# Altium PCB MCU.PcbDoc
Units mil, origin at the board's own origin, x right, y up, seen from the top; angles counter-clockwise.
Board outline 3805.33 x 3910.33 mil, 2 copper layers (Top Layer, Bottom Layer); 103 components, 97 nets, 426 pads, 104 vias.
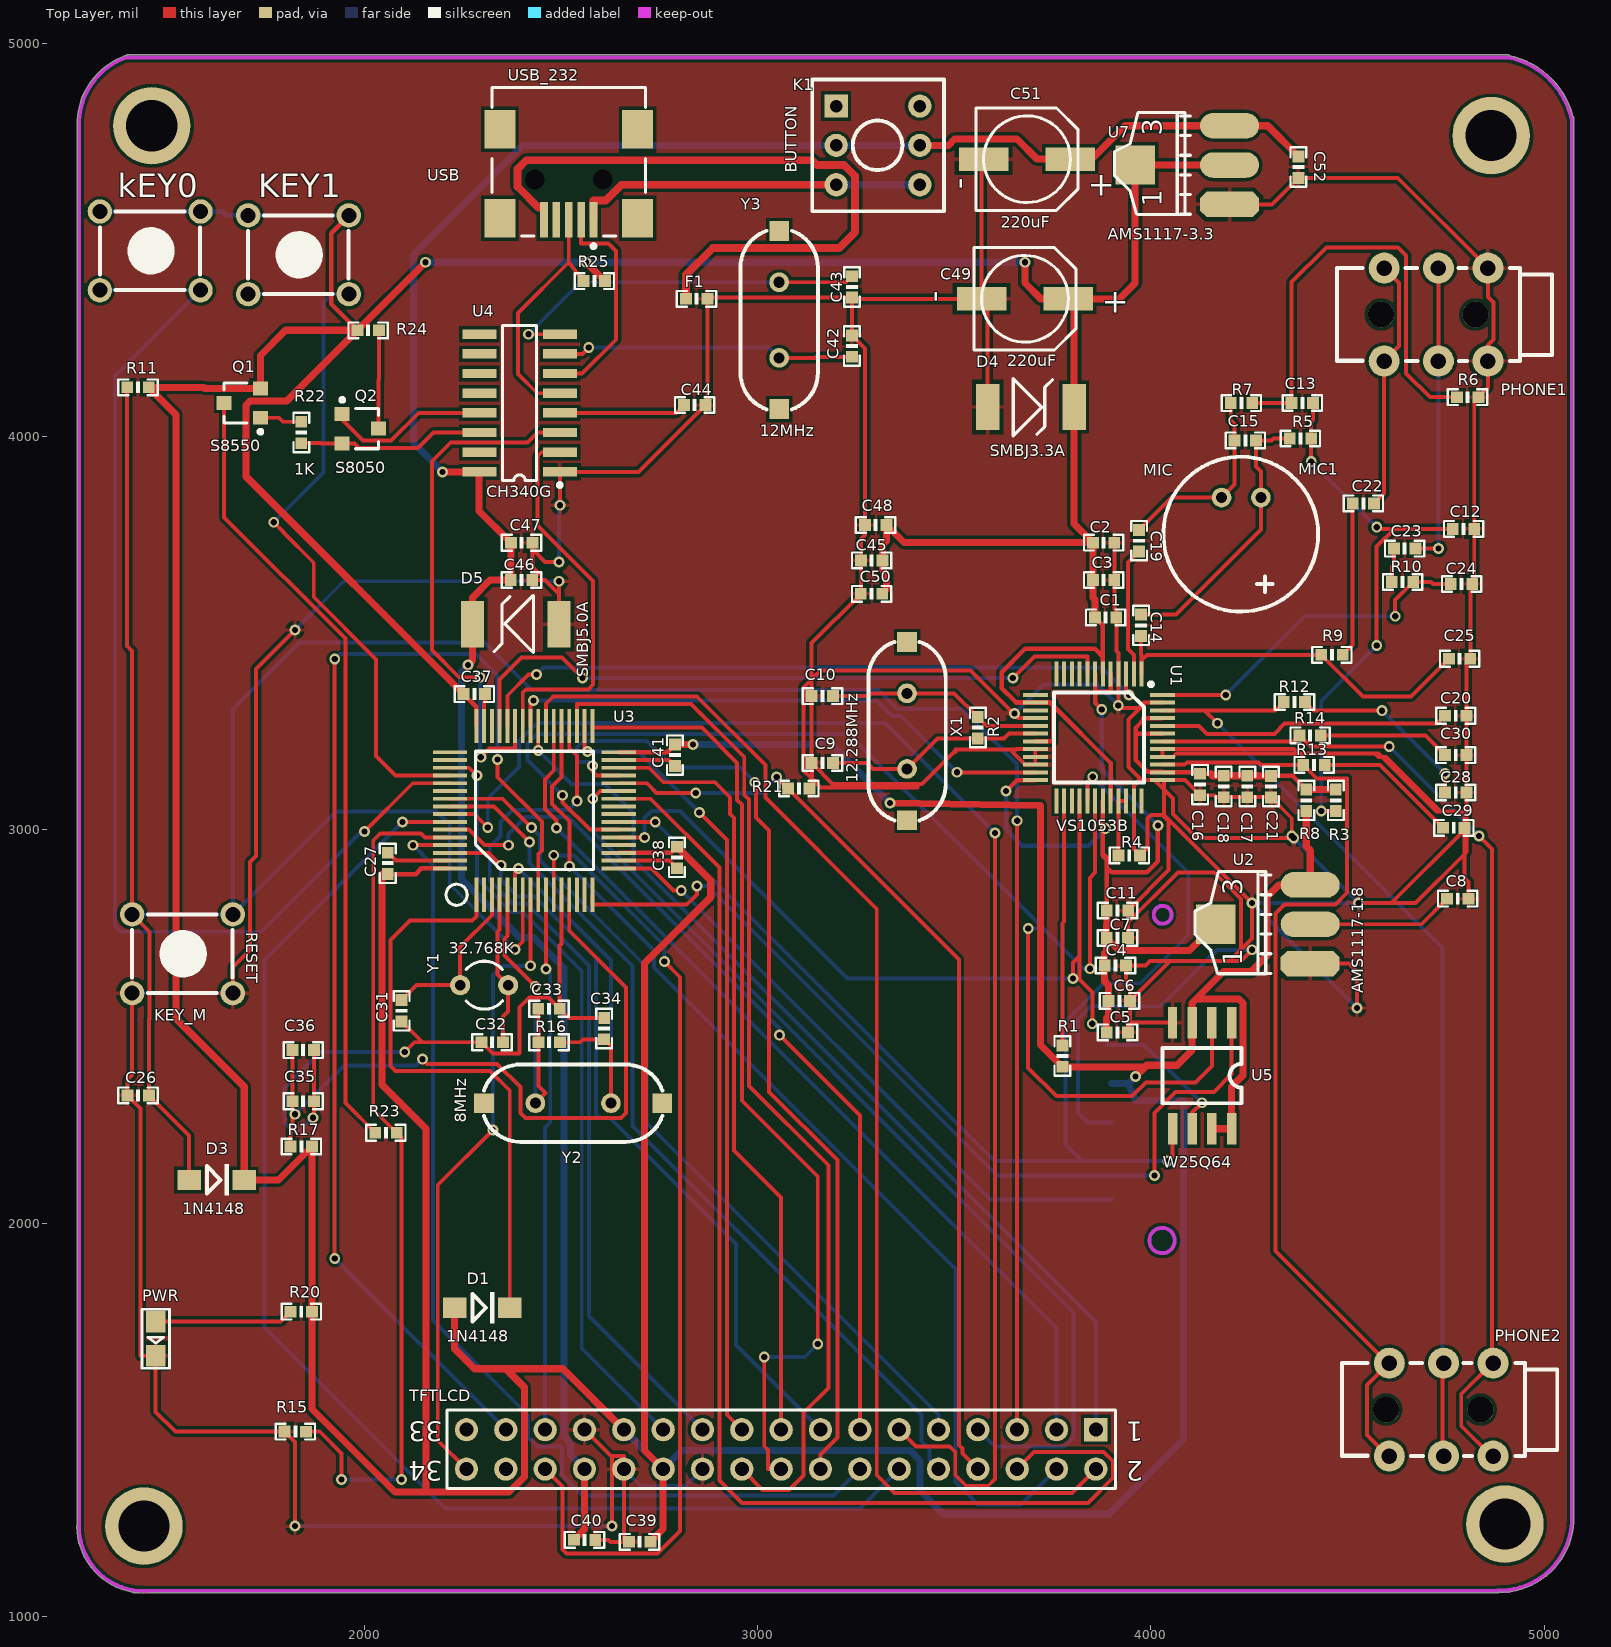
[diagram p0: Top Layer view]
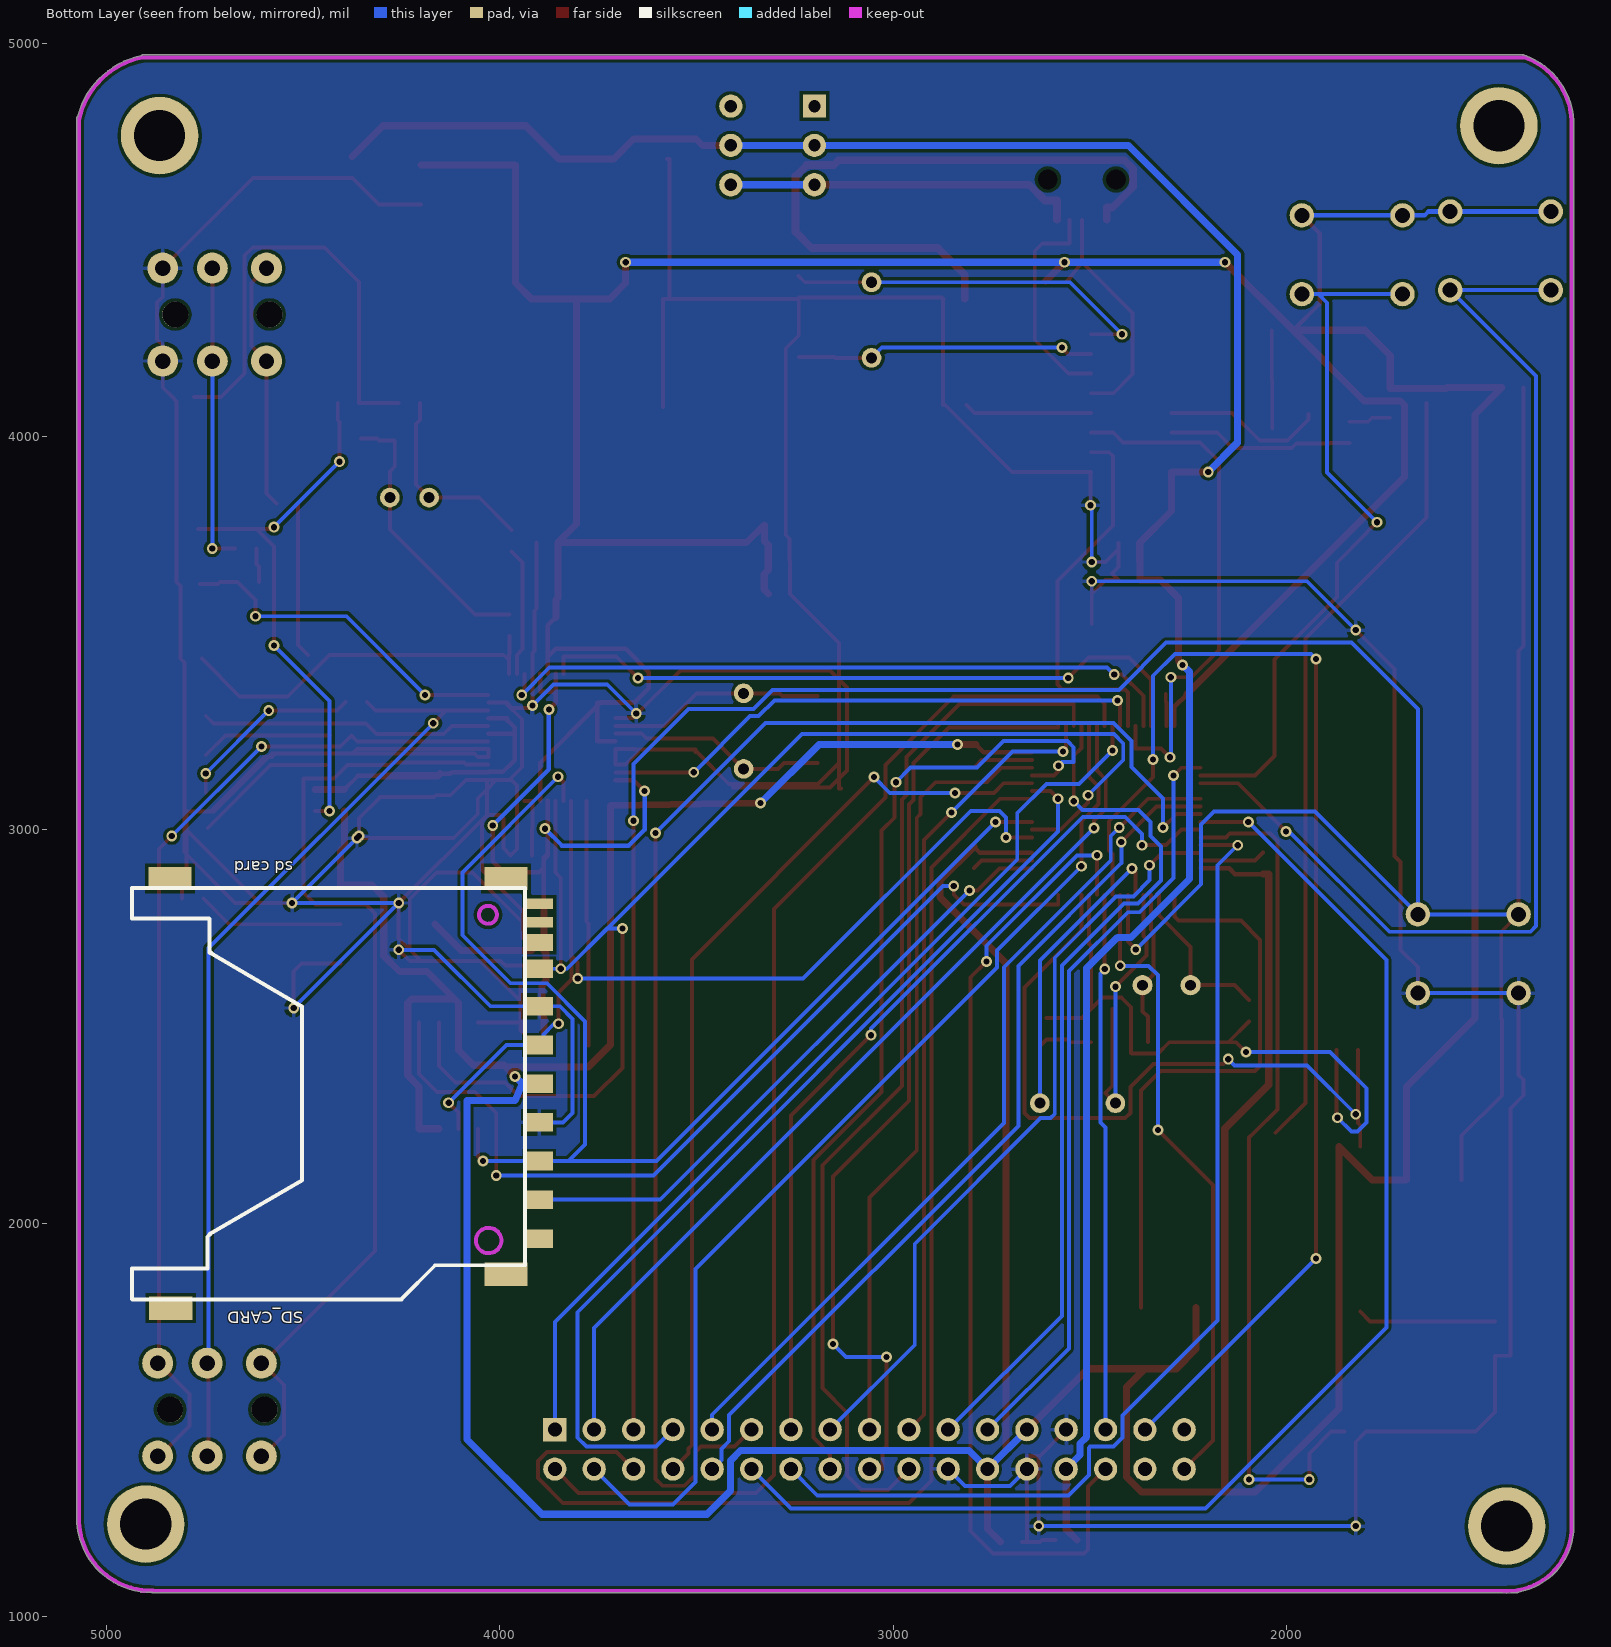
[diagram p1: Bottom Layer view, seen from below]

## Layer stack, top to bottom
Top Layer: signal copper 1.4
Dielectric: dielectric 12.6, FR-4, Dk 4.8
Bottom Layer: signal copper 1.4

## Board outline
1269.68,1230 cw(c1274.7,1230) 1269.98,1231.72 1269.98,4799.82 cw(c1275,4799.82) 1270.19,4801.24 cw(c1275,4802.66) 1269.99,4802.93 cw(c1456.74,4792.84) 1396.08,4969.74 cw(c1397.71,4965) 1397.71,4970.02 cw(c1397.71,4965) 1397.71,4970.02 4908.08,4970.02 cw(c4908.08,4965) 4911.89,4968.25 cw(c4867.4,4760.53) 5072.99,4814.02 cw(c5070,4810) 5075.02,4810 5075.02,1240.34 ccw(c5070,1240.34) 5075.02,1240.34 cw(c5070,1240.34) 5075.01,1240.07 cw(c4886.41,1250) 4884.37,1061.15 cw(c4881.16,1065) 4881.16,1059.98 1450.15,1059.98 cw(c1440,1230) 1429.85,1059.98 1415,1059.98 cw(c1415,1065) 1410.84,1062.2 cw(c1440,1230)

## Design rules (kind name [scope] priority, off if disabled: settings)
Clearance [All] p1: gap=8
PolygonConnect [All] p1: connectstyle=Relief reliefconductorwidth=10 reliefentries=4 polygonreliefangle="90 Angle" airgapwidth=10
RoutingVias [All] p1: holewidth=15.75 width=27.56 viastyle="Through Hole" minholewidth=15.75 minwidth=27.56 maxholewidth=15.75 maxwidth=27.56
SolderMaskExpansion [All] p1: expansion=4
Width Width_7 [InNet('NetK1_3')] p1: maxlimit=20 minlimit=20 preferedwidth=20
Width Width_6 [InNet('GND')] p2: maxlimit=10 minlimit=10 preferedwidth=10
Width Width_5 [InNet('CVDD')] p3: maxlimit=18 minlimit=11.5 preferedwidth=11.5
Width Width_4 [InNet('VCC')] p4: maxlimit=18 minlimit=11.5 preferedwidth=11.5
Width Width_3 [InNet('VCC5')] p5: maxlimit=18 minlimit=18 preferedwidth=18
Width Width_2 [InNet('AVDD')] p6: maxlimit=18 minlimit=11.5 preferedwidth=11.5
Width Width_1 [InNet('NetF1_1')] p7: maxlimit=19.68 minlimit=19.68 preferedwidth=19.68
Width [All] p8: maxlimit=10 minlimit=10 preferedwidth=10
28 further rules are at their usual default settings.

## Components (designator, comment, footprint, x,y, rotation, side; value= is the part's Value field where it differs from the comment)
C1 "104" 0603P 3885,3540 r180 top
C2 "104" 0603P 3880,3730 r180 top
C3 "104" 0603P 3880,3635 r180 top
C4 "104" 0603P 3910,2655 r180 top
C5 "104" 0603P 3915,2485 r180 top
C6 "104" 0603P 3920,2565 r180 top
C7 "104" 0603P 3915,2725 r180 top
C8 "10uF" 0603P 4780,2825 r0 top
C9 "22" 0603P 3165,3170 r180 top
C10 "22" 0603P 3165,3340 r180 top
C11 "104" 0603P 3915,2795 r0 top
C12 "10uf" 0603P 4795,3765 r180 top
C13 "10uf" 0603P 4385,4085 r180 top
C14 "1uf" 0603P 3975,3520 r90 top
C15 "1uf" 0603P 4240,3990 r180 top
C16 "104" 0603P 4125,3115 r90 top
C17 "104" 0603P 4245,3110 r90 top
C18 "104" 0603P 4185,3110 r90 top
C19 "1uf" 0603P 3970,3735 r90 top
C20 "1uf" 0603P 4775,3290 r180 top
C21 "10uF" 0603P 4305,3110 r270 top
C22 "1uf" 0603P 4540,3830 r0 top
C23 "1uf" 0603P 4645,3715 r0 top
C24 "104" 0603P 4790,3625 r180 top
C25 "104" 0603P 4785,3435 r180 top
C26 "10uF" 0603P 1425,2325 r0 top
C27 "104" 0603P 2060,2915 r270 top
C28 "103" 0603P 4775,3095 r180 top
C29 "103" 0603P 4770,3005 r180 top
C30 "473" 0603P 4775,3190 r180 top
C31 "22PF" 0603P 2095,2540 r90 top
C32 "22PF" 0603P 2325,2460 r0 top
C33 "22PF" 0603P 2470,2545 r180 top
C34 "22PF" 0603P 2610,2495 r270 top
C35 "10uF" 0603P 1845,2310 r0 top
C36 "104" 0603P 1845,2440 r0 top
C37 "104" 0603P 2280,3345 r180 top
C38 "104" 0603P 2795,2930 r270 top
C39 "104" 0603P 2700,1190 r0 top
C40 "104" 0603P 2560,1195 r0 top
C41 "104" 0603P 2790,3190 r270 top
C42 "22PF" 0603P 3240,4230 r270 top
C43 "22PF" 0603P 3240,4380 r90 top
C44 "104" 0603P 2840,4080 r0 top
C45 "104" 0603P 3290,3685 r0 top
C46 "10uF" 0603P 2400,3635 r180 top
C47 "104" 0603P 2400,3730 r0 top
C48 "104" 0603P 3300,3775 r0 top
C49 "220uF" CC6.56.5 3680,4350 r180 top
C50 "104" 0603P 3290,3600 r180 top
C51 "220uF" CC6.56.5 3685,4705 r180 top
C52 "104" 0603P 4375,4685 r270 top
D1 "1N4148" DIODE_SOP 2230,1785 r0 top
D3 "1N4148" DIODE_SOP 1555,2110 r0 top
D4 "SMBJ3.3A" SMBJ 3690,4075 r0 top
D5 "SMBJ5.0A" SMBJ 2390,3523 r180 top
F1 "104" 0603P 2845,4350 r0 top
K1 "BUTTON" BTN8.5*8.5 3200,4840 r0 top
kEY0 "KEY_M" KEY_M 1328,4572 r0 top
KEY1 "KEY_M" KEY_M 1705,4562 r0 top
MIC1 "MIC" MIC 4280,3845 r180 top
PHONE1 "PHONE_M" PHONE_ST 4725,4310 r0 top
PHONE2 "PHONE_M" PHONE_ST 4738,1526 r0 top
PWR "LED1" SMDLED 1470,1750 r270 top
Q1 "S8550" SOT-23R 1695,4085 r90 top
Q2 "S8050" SOT-23R 1985,4020 r270 top
R1 "100K" 0603P 3775,2425 r270 top
R2 "1M" 0603P 3560,3260 r270 top
R3 "1k" 0603P 4470,3075 r90 top
R4 "100K" 0603P 3945,2935 r0 top
R5 "1k" 0603P 4380,3995 r0 top
R6 "1k" 0603P 4805,4100 r0 top
R7 "1k" 0603P 4230,4085 r0 top
R8 "10R" 0603P 4395,3075 r90 top
R9 "510" 0603P 4460,3445 r0 top
R10 "510" 0603P 4640,3630 r180 top
R11 "10K" 0603P 1425,4125 r180 top
R12 "10R" 0603P 4365,3325 r180 top
R13 "10R" 0603P 4415,3165 r180 top
R14 "10R" 0603P 4405,3240 r180 top
R15 "10K" 0603P 1825,1470 r180 top
R16 "1M" 0603P 2470,2460 r0 top
R17 "10K" 0603P 1840,2195 r180 top
R20 "510" 0603P 1840,1775 r180 top
R21 "10K" 0603P 3105,3105 r180 top
R22 "1K" 0603P 1840,4010 r90 top
R23 "1K" 0603P 2055,2230 r0 top
R24 "10K" 0603P 2010,4270 r0 top
R25 "1.5K" 0603P 2585,4395 r180 top
RESET "KEY_M" KEY_M 1410,2785 r0 top
SD_CARD "sd card" SDCARD_L 3900,2060 r270 bottom locked
TFTLCD "TFT_LCD" HDR2X17 3860,1475 r180 top
U1 "VS1053B" mTQFP48 3925,3230 r270 top
U2 "AMS1117-1.8" AMS1117 4405,2660 r90 top
U3 "STM32F103RDT6" LQFP64 2285,2835 r90 top
U4 "CH340G" SOP16M 2395,4085 r90 top
U5 "W25Q64" SOIC-8 4205,2510 r270 top
U7 "AMS1117-3.3" AMS1117 4200,4590 r90 top
USB_232 "USB" USB/SM0.8-6H5 2520,4860 r90 top
X1 "12.288MHz" XTAL_US 3380,3155 r90 top
Y1 "32.768K" R38 2305,2605 r90 top
Y2 "8MHz" XTAL_US 2435,2305 r0 top
Y3 "12MHz" XTAL_US 3055,4200 r90 top

## Footprints (in the part's own frame and the unit in brackets; to place one, negate y for a bottom-side part, rotate by r counter-clockwise, add the part's x,y. Pads: shape width x height; smd on the part's side, far side on the other; paste and mask are expansions set on the pad)
0603P [mil]
  rect 30x30 smd: 1(-27,0) 2(27.5,-0.06)
  silkscreen extent -50,-20 50,20
AMS1117 [mil]
  oct 65x150 smd: 1(0.03,-0.06)
  oval 65x150 smd: 2(100.03,-0.06) 3(200.03,-0.06)
  rect 100x100 smd: 4(100.03,239.94)
  silkscreen extent -26,100 234,293
BTN8.5*8.5 [mm]
  rect 1.5x1.5 hole 0.8: 1(0,0)
  round 1.5 hole 0.8: 2(0,-2.54) 3(0,-5.08) 4(5.4,-5.08) 5(5.4,-2.54) 6(5.4,0)
  silkscreen extent -1.55,-6.79 6.95,1.71
CC6.56.5 [mm]
  rect 3.2x1.5 smd: 1(-2.794,0) 2(2.8,0)
  silkscreen extent -3.3,-3.3 3.3,3.3
DIODE_SOP [mm]
  rect 1.5x1.3 smd: 1(0,0) 2(3.556,0)
  silkscreen extent 1.14,-1.02 2.56,1.02
HDR2X17 [mm] "Connector; Header; 17x2 Position"
  rect 1.5x1.5 hole 0.9: 1(0,0)
  round 1.5 hole 0.9: 2(0,2.54) 3(2.54,0) 4(2.54,2.54) 5(5.08,0) 6(5.08,2.54) 7(7.62,0) 8(7.62,2.54) 9(10.16,0) 10(10.16,2.54) 11(12.7,0) 12(12.7,2.54) 13(15.24,0) 14(15.24,2.54) 15(17.78,0) 16(17.78,2.54) 17(20.32,0) 18(20.32,2.54) 19(22.86,0) 20(22.86,2.54) 21(25.4,0) 22(25.4,2.54) 23(27.94,0) 24(27.94,2.54) 25(30.48,0) 26(30.48,2.54) 27(33.02,0) 28(33.02,2.54) 29(35.56,0) 30(35.56,2.54) 31(38.1,0) 32(38.1,2.54) 33(40.64,0) 34(40.64,2.54)
  silkscreen extent -1.27,-1.27 41.91,3.81
KEY_M [mil]
  round 62 hole 38: 1(0,0) 1(255.91,0) 2(0,-200) 2(255.91,-200)
  silkscreen extent 0,-200 255,0
LQFP64 [mm] "LQFP64"
  rect 2.2x0.254 smd: 1(0,0) 2(0,-0.5) 3(0,-1) 4(0,-1.5) 5(0,-2) 6(0,-2.5) 7(0,-3) 8(0,-3.5) 9(0,-4) 10(0,-4.5) 11(0,-5) 12(0,-5.5) 13(0,-6) 14(0,-6.5) 15(0,-7) 16(0,-7.5) 33(10.9,-7.5) 34(10.9,-7) 35(10.9,-6.5) 36(10.9,-6) 37(10.9,-5.5) 38(10.9,-5) 39(10.9,-4.5) 40(10.9,-4) 41(10.9,-3.5) 42(10.9,-3) 43(10.9,-2.5) 44(10.9,-2) 45(10.9,-1.5) 46(10.9,-1) 47(10.9,-0.5) 48(10.9,0)
  rect 0.254x2.2 smd: 17(1.7,-9.2) 18(2.2,-9.2) 19(2.7,-9.2) 20(3.2,-9.2) 21(3.7,-9.2) 22(4.2,-9.2) 23(4.7,-9.2) 24(5.2,-9.2) 25(5.7,-9.2) 26(6.2,-9.2) 27(6.7,-9.2) 28(7.2,-9.2) 29(7.7,-9.2) 30(8.2,-9.2) 31(8.7,-9.2) 32(9.2,-9.2) 49(9.2,1.7) 50(8.7,1.7) 51(8.2,1.7) 52(7.7,1.7) 53(7.2,1.7) 54(6.7,1.7) 55(6.2,1.7) 56(5.7,1.7) 57(5.2,1.7) 58(4.7,1.7) 59(4.2,1.7) 60(3.7,1.7) 61(3.2,1.7) 62(2.7,1.7) 63(2.2,1.7) 64(1.7,1.7)
  silkscreen extent -0.68,-7.56 9.26,1.95
MIC [mil]
  round 50 hole 28: 1(0.42,0.29) 2(100.42,0.29)
  silkscreen extent -145,-104 248,290
mTQFP48 [mm]
  rect 1.6x0.254 smd: 1(-4.223,1.3) 2(-4.223,0.8) 3(-4.223,0.3) 4(-4.223,-0.2) 5(-4.223,-0.7) 6(-4.223,-1.2) 7(-4.223,-1.7) 8(-4.223,-2.2) 9(-4.223,-2.7) 10(-4.223,-3.2) 11(-4.223,-3.7) 12(-4.223,-4.2) 25(3.977,-4.2) 26(3.977,-3.7) 27(3.977,-3.2) 28(3.977,-2.7) 29(3.977,-2.2) 30(3.977,-1.7) 31(3.977,-1.2) 32(3.977,-0.7) 33(3.977,-0.2) 34(3.977,0.3) 35(3.977,0.8) 36(3.977,1.3)
  rect 0.254x1.6 smd: 13(-2.873,-5.55) 14(-2.373,-5.55) 15(-1.873,-5.55) 16(-1.373,-5.55) 17(-0.873,-5.55) 18(-0.373,-5.55) 19(0.127,-5.55) 20(0.627,-5.55) 21(1.127,-5.55) 22(1.627,-5.55) 23(2.127,-5.55) 24(2.627,-5.55) 37(2.627,2.65) 38(2.127,2.65) 39(1.627,2.65) 40(1.127,2.65) 41(0.627,2.65) 42(0.127,2.65) 43(-0.373,2.65) 44(-0.873,2.65) 45(-1.373,2.65) 46(-1.873,2.65) 47(-2.373,2.65) 48(-2.873,2.65)
  silkscreen extent -3.68,-4.35 2.78,2.03
PHONE_ST [mm]
  round 1.676 hole 1.676: 0(-3.556,0) 0(2.54,0)
  round 2 hole 1: 1(-3.35,-3) 1(-3.35,3) 2(0.15,-3) 2(0.15,3) 3(3.35,-3) 3(3.35,3)
  silkscreen extent -6.39,-3.01 7.49,3
R38 [mm] "Crystal, Thru-Hole; 2 Leads; Body 3.1 x 8.2 mm (Dia.xH)"
  round 1.3 hole 0.7: 1(0,1.55) 2(0,-1.55)
  silkscreen extent -1.55,-1.19 1.55,1.17
SDCARD_L [mm]
  rect 1.2x1.8 smd: 1(0,0) 2(-2.489,0) 3(-4.983,-0.009) 4(-7.483,-0.009) 5(-9.983,-0.009) 6(-12.483,-0.009) 7(-14.908,-0.009) 9(2.517,-0.009)
  rect 1.1x1.8 smd: 8(-16.612,0)
  rect 0.7x1.8 smd: 10(-17.908,-0.009) 12(-19.101,0)
  rect 1.5x2.8 smd: 11(-20.726,-23.834) 11(-20.726,-2.143) 11(4.826,-2.143) 11(7.01,-23.784)
  Keep-Out Layer circle w0.254: c2.642,-3.26 r0.82
  Keep-Out Layer circle w0.254: c-18.39,-3.3 r0.58
  silkscreen extent -20.13,-26.3 6.44,-0.9
SMBJ [mm]
  rect 1.5x3 smd: 1(-2.667,0) 2(2.921,0)
  silkscreen extent -1.02,-1.85 1.52,1.83
SMDLED [mm]
  rect 1.4x1.27 smd: 1(0.001,-0.002) 2(2.211,-0.002)
  silkscreen extent -0.8,-0.89 3.01,0.89
SOIC-8 [mil]
  rect 80x24 smd: 1(0,0) 2(0,-50.06) 3(0,-100.06) 4(0,-150.06) 5(270,-150) 6(270,-100) 7(270,-50) 8(270,0)
  silkscreen extent 65,-175 205,25
SOP16M [mm]
  rect 0.6x2.2 smd: 1(-4.445,-2.6) 2(-3.175,-2.6) 3(-1.905,-2.6) 4(-0.635,-2.6) 5(0.635,-2.6) 6(1.905,-2.6) 7(3.175,-2.6) 8(4.445,-2.6) 9(4.445,2.6) 10(3.175,2.6) 11(1.905,2.6) 12(0.635,2.6) 13(-0.635,2.6) 14(-1.905,2.6) 15(-3.175,2.6) 16(-4.445,2.6)
  silkscreen extent -5.42,-2.72 5,1.1
SOT-23R [mm]
  rect 0.9x0.95 smd: 1(0.95,-1.048) 2(-0.95,-1.048) 3(0,1.302)
  silkscreen extent -1.98,-1.17 1.3,1.3
USB/SM0.8-6H5 [mm]
  rect 2.3x0.5 smd: 1(-7.85,-1.6) 2(-7.85,-0.8) 3(-7.85,0) 4(-7.85,0.8) 5(-7.85,1.6)
  rect 2.5x2 smd: 6(-7.75,4.45) 7(-1.996,4.45) 8(-7.75,-4.45) 9(-1.996,-4.45)
  round 0.6 hole 1.27 unplated: MH1(-5.25,2.2) MH2(-5.25,-2.2)
  silkscreen extent -9.67,-4.95 0.7,4.95
XTAL_US [mil]
  round 50 hole 28: 1(0,0) 2(192.13,0)
  rect 50x50 smd: ""(-130.32,0) ""(322.44,0)
  silkscreen extent -131,-98 323,98

## Part data
C1 C2 C3 C4 C5 C6 C7 C8 C9 C10 C11 C12 C13 C14 C15 C16 C17 C18 C19 C20 C21 C22 C23 C24 C25 C26 C27 C28 C29 C30 C31 C32 C33 C34 C35 C36 C37 C38 C39 C40 C41 C42 C43 C44 C45 C46 C47 C48 C50 C52 F1: library part C
C49 C51: library part CAP
D1 D3: library part D
D4 D5: library part SMBJ, "TVS"
PWR: library part LED2, "Typical RED, GREEN, YELLOW, AMBER GaAs LED"
Q1: library part PNP, "8550/BCW68"
Q2: library part NPN, "8050/BCW846/BCW847"
R1 R2 R3 R4 R5 R6 R7 R8 R9 R10 R11 R12 R13 R14 R15 R16 R17 R20 R21 R22 R23 R24 R25: library part R
U1: library part VS1053
U2 U7: library part AMS1117
U4: "USB2UART"
U5: library part W25X16, "W25X16;SST25VF016;MX25L1605"
USB_232: library part USB5
X1 Y1 Y2 Y3: library part XTAL, "Crystal Oscillator"

## Free pads (board coordinates)
  round 196.85 hole 129.92: 1(1440,1230) 2(1460,4790) 3(4865,4765) 4(4900,1235)

## Via types
v1: diameter 27.56, hole 15.75, Top Layer to Bottom Layer, 104 vias

## Nets (pads, with @x,y where several pads share a name; then routed paths per layer and width w, separated by ;. In a path a pad name is that pad's centre, name@x,y a point inside that pad or via, vN(x,y) a via of type N, cw(c..) or ccw(c..) an arc to the next point about the centre after c; other vN are vias at no path point)
AVDD: C16.2 C17.2 C18.2 C21.1 R3.2 R8.2 U1.38 U1.43 U1.45 | length 772.6
  Top Layer w11.5: 3981,3284 3981.05,3284.05 3986.05,3284.05 ; U1.43 3962,3244.68 ; U1.45 3986.05,3284.05 ; 4152,3142.5 C16.2 4125.06,3144.56 4123,3144.56 4121.3,3146.26 U1.38 4028.4,3147.19 3992.14,3147.19 3962,3177.33 3962,3244.68 ; C21.1 4360.56,3137 R8.2 ; 3962,3244.68 3962,3260 3986.05,3284.05
  Top Layer w18: 4152,3142.5 4157,3137.5 C18.2 C17.2 4274,3137.5 4274.5,3137 C21.1 ; R8.2 R3.2
BOOT0: R15.1 R23.2 U3.60 | length 2193.8
  Top Layer w10: R15.1 1887,1470 1942,1415 v1(1942,1348) ; v1(2095,1348) 2095,2217.43 R23.2 2023,2289.43 2023,2972.67 2040.85,2990.52 2144.27,2990.52 2154.12,2980.67 U3.60
  Bottom Layer w10: v1(1942,1348) v1(2095,1348)
"CH340 +": R25.2 U4.5 USB_232.3 | length 632.9
  Top Layer w10: U4.5 2440,4110 2391,4159 2391,4314 2520,4443 ; USB_232.3 2520,4443 ; R25.2 2520,4443
"CH340 -": U4.6 USB_232.2 | length 560.6
  Top Layer w10: U4.6 2554,4160 2640,4246 2640,4472 2621,4491 2551.5,4491 USB_232.2
CVDD: C4.2 C5.2 C6.2 C7.2 C11.1 U1.5 U1.7 U1.24 U1.31 U2.4 | length 2195.4
  Top Layer w11.5: v1(3632,3098.57) 3660,3126.57 U1.24 ; U1.7 3858.07,3351 ; v1(3875,3306) 3858.07,3322.93 3858.07,3351 ; U1.31 v1@3877.76,3010.24 ; v1(3885,3003) v1@3877.76,3010.24 ; C11.1 3888,2904 ; U1.5 3897.44,3351 3858.07,3351 ; v1(4018,3011) 4018,2920 3990,2892 3900,2892 3888,2904 ; 3877.76,2939.24 v1@3877.76,3010.24 ; 3877.76,2939.24 3888,2929 3888,2923.76 ; 3877.76,2939.24 3877.76,2934 3888,2923.76 ; 3888,2904 3888,2923.76
  Top Layer w18: C5.2 3887.5,2522 3892.5,2527 C6.2 3892.5,2605 3882.5,2615 C4.2 3882.5,2687 3887.5,2692 C7.2 ; C11.1 3888,2759.5 3887.5,2759 C7.2 ; U2.4 4098.03,2693 3919.56,2693 C7.2
  Bottom Layer w11.5: v1(3632,3098.57) 3632,3000 3672,2960 3842,2960 v1(3885,3003) ; v1(3875,3306) 3875,3154 v1(4018,3011)
"F CS": U3.16 U5.1 | length 2317.4
  Top Layer w10: U3.16 2580.27,2810 2820,2810 2846,2836 v1(2846,2857) ; v1(4009,2121) 4009,2280 4063,2334 4160,2334 4205,2379 U5.1
  Bottom Layer w10: v1(2846,2857) 2873.46,2857 3609.46,2121 v1(4009,2121)
GND: C1.1 C2.1 C3.1 C4.1 C5.1 C6.1 C7.1 C8.2 C9.2 C10.2 C11.2 C12.1 C16.1 C17.1 C18.1 C20.1 C21.2 C24.1 C25.1 C26.1 C28.1 C29.1 C30.1 C39.1 C40.2 C42.1 C43.1 C44.2 C45.1 C46.1 C47.2 C48.1 C49.2 C50.2 C51.2 C52.2 D4.1 D5.1 F1.2 PHONE1.3 PWR.2 R4.2 R6.2 R15.2 R21.1 RESET.2 SD_CARD.3 SD_CARD.6 TFTLCD.22 TFTLCD.26 TFTLCD.27 U1.4 U1.16 U1.20 U1.21 U1.22 U1.35 U1.37 U1.40 U1.41 U1.47 U2.1 U4.1 U5.4 U7.1 | length 22462.3
  Top Layer w10: RESET.2@1410,2585 1410,2377 1398,2365 C26.1 1431,2292 1431,1662.96 PWR.2 1469.94,1520 1519.87,1470.06 R15.2 1824,1443.56 v1(1824,1230) ; RESET.2@1665.91,2585 1665.91,2650.91 1710,2695 1710,2918 1725,2933 1725,3409 v1(1824,3508) ; C47.2 2427.5,3713.5 ; D5.1 2495,3600 ; v1(2495,3632) 2495,3600 ; v1(2495,3681) 2460,3681 2427.5,3713.5 ; U4.1 U4.1@2498,3910 ; v1(2498,3825) U4.1@2498,3910 ; TFTLCD.27 2627,1408 ; C40.2 2621.06,1194.94 2626,1190 C39.1@2660,1190 ; v1(2630,1230) 2630,1405 2627,1408 ; C39.1 C39.1@2660,1190 ; R21.1 3138,3105 3138,3130 ; C51.2 3569,4705 C49.2@3569,4350 ; D4.1 3585,4350 C49.2 C49.2@3569,4350 ; v1(3653,3296) v1@3662,3287 ; U1.22 U1.22@3706,3165.94 ; U1.21 U1.21@3706,3185.63 ; U1.20 U1.20@3706,3205.31 ; U1.16 3664.95,3284.05 v1@3662,3287 ; C2.1 C3.1 3907,3562 3912,3557 C1.1 3912,3455.13 3917.13,3450 U1.4 v1(3917.13,3316) 3923.13,3310 3968.58,3310 3982,3323.42 3986.42,3323.42 ; C7.1 3942,2765 ; U1.47 3986.42,3323.42 ; U5.4 3947,2510 ; U7.1 4307.47,4590.03 C52.2 4627.5,4657.5 4856.89,4428.11 4856.89,4355.11 4871,4341 4871,4247.11 4856.89,4233 4856.89,4191.89 4856.89,4124.33 R6.2 4822,4089.44 C12.1 4822,3630 C24.1 4812,3620 C25.1 4802,3425 C20.1 C30.1 C28.1 4802,3052 ; v1(4257,2695) 4229,2667 4200,2667 ; v1(4358,2984) 4358,3029.44 C21.2 4304.44,3083 C17.1 C18.1 4167,3083 4162,3088 C16.1 4086.43,3126.57 U1.37@4033,3126.57 ; v1(4363,2979) 4117,2979 4056,3040 4056,3080 4033,3103 ; U2.1 4503.97,2660.03 4524,2640 v1(4524,2547) ; v1(4528,2814) 4611,2814 ; C8.2 4807.5,2867.5 4797,2878 4797,2938 ; 2427.5,3713.5 2427.5,3668.5 2444,3652 C46.1 2460,3635 2495,3600 ; U4.1@2498,3910 2697.56,3910 C44.2 2873,4079.94 2873,4349.44 F1.2 2875.56,4353 C43.1 ; 2627,1408 2660,1408 TFTLCD.26 C39.1@2660,1190 ; 3137.5,3382.5 3137.5,3475.06 C50.2 3262.5,3684.5 C45.1 3263,3740 3273,3750 C48.1 3273,4224 C42.1 C43.1 ; 3137.5,3382.5 C10.2 C9.2 C9.2@3138,3169.56 ; 3137.5,3382.5 3160,3405 3541.05,3405 3662,3284.05 v1@3662,3287 ; 3137.5,3382.5 3117,3362 3117,3151 3138,3130 ; 3138,3130 3160,3108 3407,3108 3407,3117 ; 3138,3130 C9.2@3138,3169.56 ; C9.2@3138,3169.56 3190.56,3117 3407,3117 ; C43.1 3243,4350 C49.2@3569,4350 ; 3407,3117 3418,3117 3499,3198 3503,3198 3503,3204 3647.94,3204 ; 3647.94,3204 3658,3204 3659.31,3205.31 U1.20@3706,3205.31 ; 3647.94,3204 3647.94,3198 3680,3165.94 U1.22@3706,3165.94 ; U1.22@3706,3165.94 U1.21@3706,3185.63 ; U1.21@3706,3185.63 U1.20@3706,3205.31 ; 3942,2765 4069,2892 4161,2892 4229,2824 4229,2696 ; 3942,2765 3942,2794.44 C11.2 4045,2897.44 4045,3023 4030,3038 4000,3038 3991,3029 3991,2953.44 R4.2 3956.5,2950.94 U1.35 3956.5,3113.07 3970,3126.57 U1.37@4009.43,3126.57 ; 3947,2510 C6.1 ; 3947,2510 3947,2490 C5.1 3942,2510 3947,2510 ; C6.1 3947,2605 3937,2615 C4.1 3986,2655 3998,2667 4049,2667 ; C6.1 4049,2667 ; 3986.42,3323.42 3943,3280 3943,3160 3976,3127 4009,3127 U1.37@4009.43,3126.57 ; U1.37@4009.43,3126.57 4033,3103 ; U1.37@4009.43,3126.57 U1.37 U1.37@4033,3126.57 ; 4033,3103 U1.37@4033,3126.57 ; 4033,3103 4033,3038 v1(4257,2814) 4257,2724 4229,2696 ; 4049,2667 4200,2667 ; 4200,2667 4229,2696 ; 4375,3194 4064.37,3194 4056,3185.63 U1.40 4029,3185.63 4029,3205.31 U1.41 4363.69,3205.31 4375,3194 ; 4375,3194 4570,3194 ; 4570,3194 4579.02,3194 4588.02,3185 ; 4570,3194 4579,3185 4588.02,3185 ; 4588.02,3185 4598,3185 4736,3047 ; 4588.02,3185 4726.02,3047 4736,3047 ; 4611,2814 C29.1@4797,3000 ; 4611,2814 4673,2814 4797,2938 ; 4736,3047 4797,3047 ; 4797,2938 C29.1@4797,3000 ; 4797,2938 4802,2943 4802,3052 ; C29.1@4797,3000 4800,3003 4800,3044 4797,3047 ; C29.1@4797,3000 C29.1 4797,3047 ; 4797,3047 4802,3052
  Bottom Layer w10: RESET.2@1410,2585 RESET.2@1665.91,2585 ; v1(1824,1230) v1(2630,1230) ; v1(1824,3508) 1948,3632 v1(2495,3632) ; v1(2495,3681) 2495,3822 v1(2498,3825) ; TFTLCD.26 2703,1332 2817,1332 TFTLCD.22 ; v1(3653,3296) 3726.76,3369.76 3863.36,3369.76 v1(3917.13,3316) ; SD_CARD.3 3838.82,2256.18 3815,2280 3815,2519.54 3846.91,2551.46 SD_CARD.6 4024,2551.46 4167.54,2695 v1(4257,2695) ; v1(4358,2984) v1(4363,2979) v1(4528,2814) v1(4257,2814) v1(4524,2547)
KEY0: kEY0.2 U3.53 | length 2977.4
  Top Layer w10: v1(2001,2996) 2123.46,3118.46 U3.53
  Bottom Layer w10: kEY0.2@1328,4372 1583.91,4372 1366,4154.09 1366,2755 1380,2741 1738.45,2741 1993.45,2996 v1(2001,2996)
KEY1: KEY1.2 U3.52 | length 1808
  Top Layer w10: v1(1770,3782) 1795,3757 1795,3755.65 1871.65,3679 1871.65,3591.81 2030,3433.46 2030,3188.15 2080,3138.15 U3.52
  Bottom Layer w10: KEY1.2@1705,4362 1919,4362 ; v1(1770,3782) 1897,3909 1897,4340 1919,4362 ; KEY1.2@1960.91,4362 1919,4362
"LCD BL": TFTLCD.23 U3.51 | length 1953.3
  Top Layer w10: U3.51 2266.9,3157.83 v1(2286.9,3137.83)
  Bottom Layer w10: v1(2286.9,3137.83) 2286.9,2877.34 2373.78,2790.46 2403.43,2790.46 2553.13,2640.76 2553.13,1681.87 TFTLCD.23
"LCD CS": TFTLCD.1 U3.40 | length 2424.9
  Top Layer w10: v1(2442.48,3201.52) U3.40
  Bottom Layer w10: v1(2442.48,3201.52) 2527.46,3116.54 2610.44,3116.54 2684.54,3042.45 2684.54,2924.44 3860,1748.98 TFTLCD.1
"LCD D0": TFTLCD.6 U3.26 | length 3249.4
  Top Layer w10: U3.26 2728,3079.09 2902.96,2904.13 2902.96,1346.04 2960,1289 3840,1289 3903,1352 3903,1395 3880,1418 3703,1418 TFTLCD.6
"LCD D1": TFTLCD.7 U3.27 | length 2475.4
  Top Layer w10: v1(2581,3079) 2581,3079.78 2600,3098.78 U3.27
  Bottom Layer w10: v1(2581,3079) 2581,2995.26 3803,1773.26 3803,1455 3780,1432 3603,1432 TFTLCD.7
"LCD D2": R21.2 TFTLCD.8 U3.28 | length 2398.9
  Top Layer w10: U3.28 2719,3118.46 2743.46,3094 v1(2842.87,3094) ; v1(3048.56,3134) R21.2 3511.67,2670.89 3511.67,1435.53 3520.53,1426.67 3520.53,1414.47 TFTLCD.8
  Bottom Layer w10: v1(2842.87,3094) 3008.56,3094 v1(3048.56,3134)
"LCD D3": TFTLCD.9 U3.55 | length 2196.9
  Top Layer w10: U3.55 2351.91,3079.09 v1(2425,3006)
  Bottom Layer w10: v1(2425,3006) 2446.78,2984.22 2446.78,2922.12 2718.22,2650.68 2718.22,2254.78 3460,1513 TFTLCD.9
"LCD D4": TFTLCD.10 U3.56 | length 2264.4
  Top Layer w10: U3.56 2329.96,3059.41 v1(2420,2969.37)
  Bottom Layer w10: v1(2420,2969.37) 2420,2915.54 2681.82,2653.73 2681.82,2247.18 3417,1512 3417,1445.6 3436.72,1425.89 3436.72,1398.28 TFTLCD.10
"LCD D5": TFTLCD.11 U3.57 | length 3694.4
  Top Layer w10: U3.57 2280.28,3039.72 v1(2314,3006) ; TFTLCD.11 3403,1432 3488.53,1432 3502.53,1418 3502.53,1359.94 3530,1332.47 3586.47,1332.47 3604,1350 v1(3604,2992.04)
  Bottom Layer w10: v1(2314,3006) 2314,3080 2394,3160 2394,3226 2440,3272 3324.04,3272 v1(3604,2992.04)
"LCD D6": TFTLCD.12 U3.58 | length 3397.5
  Top Layer w10: v1(2097,3020.04) U3.58
  Bottom Layer w10: v1(2097,3020.04) 1746,2669.04 1746,1735 2206,1275 3260,1275 TFTLCD.12
"LCD D7": TFTLCD.13 U3.59 | length 2228
  Top Layer w10: U3.59 2266.55,3000.35 2305.9,2961 v1(2367,2961) ; v1(3056,2478) 3260,2274 TFTLCD.13
  Bottom Layer w10: v1(2367,2961) 2367,2989.78 2410,3032.78 2518.03,3032.78 3056,2494.81 v1(3056,2478)
"LCD D8": TFTLCD.14 U3.61 | length 2693.2
  Top Layer w10: v1(2124,2960.98) U3.61
  Bottom Layer w10: v1(2124,2960.98) 2175,2909.98 2175,1753 2417,1511 2417,1455 2440,1432 2499,1432 2502.53,1428.47 2502.53,1360 2554.53,1308 3193,1308 TFTLCD.14
"LCD D9": TFTLCD.15 U3.62 | length 1954.6
  Top Layer w10: U3.62 2316.7,2941.3 v1(2348,2910)
  Bottom Layer w10: v1(2348,2910) 2348,2872.14 2389.28,2830.86 2433.14,2830.86 2589.13,2674.87 2589.13,2277.87 2600,2267 2625,2267 2945,1947 2945,1690 TFTLCD.15
"LCD D10": TFTLCD.16 U3.29 | length 2519.3
  Top Layer w10: v1(2580,3163) 2580,3149.15 2591,3138.15 U3.29 ; v1(2993,3121) 2996,3118 2996,3031 3029.22,2997.78 3029.22,2334 3203,2160.22 3203,1455 3160,1412 TFTLCD.16
  Bottom Layer w10: v1(2580,3163) 2571,3172 2541,3172 2541,3210 2557,3226 2719,3226 2787,3158 2956,3158 v1(2993,3121)
"LCD D11": TFTLCD.17 U3.30 | length 1975.6
  Top Layer w10: U3.30 2724.17,3157.83 2761,3121 2892,3121 2930.22,3082.78 2930.22,3040.5 2940,3030.72 2940,2185 3060,2065 TFTLCD.17
"LCD D12": TFTLCD.18 U3.33 | length 2443.1
  Top Layer w10: U3.33 2580.27,3260 2858.45,3260 2948.22,3170.23 2948.22,3076.22 2960,3064.44 2960,2311.22 3153,2118.22 v1(3153,1693) ; v1(3017,1660) 3017,1433 3027,1423 3027,1375 TFTLCD.18
  Bottom Layer w10: v1(3017,1660) 3120,1660 v1(3153,1693)
"LCD D13": TFTLCD.19 U3.34 | length 2030
  Top Layer w10: U3.34 2560.59,3206.41 v1(2568,3199) ; v1(2852,3043.7) 2922,2973.7 2922,1513 TFTLCD.19
  Bottom Layer w10: v1(2568,3199) 2696.7,3199 v1(2852,3043.7)
"LCD D14": TFTLCD.20 U3.35 | length 2672.7
  Top Layer w10: U3.35 2540.9,3320.44 2830.78,3320.44 2966.22,3185 2966.22,3088.78 2978,3077 2978,2349.22 3180,2147.22 3180,1581 3117,1518 3117,1359 3080,1322 3013,1322 TFTLCD.20
"LCD D15": TFTLCD.21 U3.36 | length 2217.3
  Top Layer w10: U3.36 2521.22,3208 2540.9,3188.32 v1(2540.9,3072.9)
  Bottom Layer w10: v1(2540.9,3072.9) 2518.78,3050.78 2376.56,3050.78 2346,3020.23 2346,2984.05 2319.22,2957.26 2319.22,2871.1 2377.46,2812.86 2413.08,2812.86 2571.13,2654.82 2571.13,1763.87 TFTLCD.21
"LCD RD": TFTLCD.4 U3.37 | length 2674.8
  Top Layer w10: U3.37 2501.53,3134.09 2477.44,3110 2477.44,3066 2521.53,3021.91 v1(2521.53,2907.47)
  Bottom Layer w10: v1(2521.53,2907.47) 2736.22,2692.78 2736.22,2650 3503,1883.22 3503,1342 3560,1285 3670,1285 TFTLCD.4
"LCD RS": TFTLCD.2 U3.39 | length 3216.6
  Top Layer w10: U3.39 2462.16,3320.61 2480,3338.44 2846.45,3338.44 3019.78,3165.11 3019.78,3082.22 3303,2799 3303,1360 3348.53,1314.47 3799.47,1314.47 TFTLCD.2
"LCD WR": TFTLCD.3 U3.38 | length 2337.1
  Top Layer w10: U3.38 2481.85,3150.41 2459.44,3128 2459.44,3052.78 2489,3023.22 v1(2489,3004.86)
  Bottom Layer w10: v1(2489,3004.86) 3760,1733.86 TFTLCD.3
NetBAT1_1: 
NetC8_1: C8.1 U2.2 | length 374.8
  Top Layer w10: U2.2 4688.03,2760.03 C8.1
NetC9_1: C9.1 R2.2 U1.18 X1.1 | length 557.9
  Top Layer w10: C9.1 3278,3170 3293,3155 X1.1 3457.5,3232.5 R2.2 3627,3232.5 3639.18,3244.68 U1.18
NetC10_1: C10.1 R2.1 U1.17 X1.2 | length 551.7
  Top Layer w10: C10.1 3282,3340 3289.13,3347.13 X1.2 3499.87,3347.13 R2.1 3582.63,3264.37 U1.17
NetC12_2: C12.2 C13.1 R3.1 R5.2 | length 1412.8
  Top Layer w10: v1(4407.5,3936) R5.2 4407.5,4037 4412,4041.5 C13.1 ; v1(4433,3048) R3.1 ; v1(4574,3469) 4574,3720 4619.06,3765.06 ; v1(4574,3769.5) 4578.44,3765.06 4619.06,3765.06 ; C12.2 4619.06,3765.06
  Bottom Layer w10: v1(4407.5,3936) v1(4574,3769.5) ; v1(4433,3048) 4433,3328 v1(4574,3469)
NetC13_2: C13.2 R6.1 R7.2 | length 1198.2
  Top Layer w10: R7.2 4307,4084.94 4307.13,4085.06 C13.2 4357.5,4392.5 4446,4481 4628,4481 4649,4460 4649,4160 4709,4100 R6.1
NetC14_1: C14.1 C25.2 R9.1 U1.1 | length 968
  Top Layer w10: C14.1 3975,3445.18 3976.18,3444 3976.18,3431.18 ; U1.1 3976.18,3431.18 ; C25.2 4661.44,3339 4539,3339 R9.1 3990,3445 3976.18,3431.18
NetC14_2: C14.2 C15.1 MIC1.1 R5.1 | length 713.7
  Top Layer w10: C14.2 4063.5,3547.5 4279.58,3763.58 MIC1.1 4279.58,3911 4267,3923.58 C15.1 4307,3990 4312,3995 R5.1
NetC15_2: C15.2 C19.2 MIC1.2 R7.1 | length 501.4
  Top Layer w10: C19.2 4052.27,3844.71 MIC1.2 4212.5,3877.63 C15.2 4212.5,4032 4203,4041.5 R7.1
NetC19_1: C19.1 U1.2 | length 329.3
  Top Layer w10: U1.2 3956.5,3445 3942,3459.5 3942,3680 C19.1
NetC20_2: C20.2 U1.44 | length 745.7
  Top Layer w10: U1.44 4122.02,3264.37 4142.44,3243.95 4313.95,3243.95 4340,3270 4727.44,3270 C20.2
NetC22_1: C22.1 R9.2 | length 395.6
  Top Layer w10: R9.2 4513,3470.44 C22.1
NetC22_2: C22.2 PHONE1.1 | length 640.2
  Top Layer w10: C22.2 4593.11,3855.55 4593.11,4191.89 4631,4229.78 4631,4390.22 PHONE1.1@4593.11,4428.11
NetC23_1: C23.1 R10.2 | length 87.2
  Top Layer w10: R10.2 4612.5,3669 4618,3674.5 C23.1
NetC23_2: C23.2 PHONE1.2 | length 771.6
  Top Layer w10: C23.2 v1(4730.91,3714.94) ; PHONE1.2@4730.91,4191.89 PHONE1.2@4730.91,4428.11
  Bottom Layer w10: v1(4730.91,3714.94) PHONE1.2@4730.91,4191.89
NetC24_2: C24.2 R10.1 U1.48 | length 878.1
  Top Layer w10: U1.48 v1(4190.11,3343.11) ; v1(4621,3543) 4621,3584 R10.1 4712,3630 4716.94,3625.06 C24.2
  Bottom Layer w10: v1(4190.11,3343.11) 4390,3543 v1(4621,3543)
NetC27_1: C27.1 U3.63 | length 166.5
  Top Layer w10: C27.1 2080.39,2921.61 U3.63
NetC28_2: C28.2 R12.1 | length 478.8
  Top Layer w10: R12.1 4414,3303 v1(4587.5,3303) ; C28.2 v1(4747.5,3143)
  Bottom Layer w10: v1(4587.5,3303) v1(4747.5,3143)
NetC29_2: C29.2 R13.1 | length 366.7
  Top Layer w10: R13.1 4582.56,3165 C29.2
NetC30_2: C30.2 R14.1 | length 336.2
  Top Layer w10: R14.1 4697.56,3240 C30.2
NetC31_1: C31.1 C32.1 C33.1 C34.1 C35.2 C36.2 U3.12 | length 1746
  Top Layer w10: v1(1870,2268) 1872.5,2270.5 C35.2 C36.2 ; C31.1 2148,2460 ; v1(2103,2435) 2128,2460 2148,2460 ; U3.12 2501.53,2710 2497,2705.47 C33.1 ; C34.1 2520,2522 C33.1 ; 2148,2460 C32.1 2327,2431 2393,2431 2395,2433 2395,2549 2420,2574 2468,2574 C33.1
  Bottom Layer w10: v1(1870,2268) 1835,2233 1820,2233 1797,2256 1797,2343 1889,2435 v1(2103,2435)
NetC31_2: C31.2 U3.3 Y1.1 | length 427.7
  Top Layer w10: C31.2 2132.56,2605 Y1.1 2243.98,2702.43 2324.37,2782.82 U3.3
NetC32_2: C32.2 U3.4 Y1.2 | length 394.5
  Top Layer w10: U3.4 2344.05,2746.5 2338.33,2740.78 2338.33,2632.69 Y1.2 2366.02,2538.52 2352.5,2525 C32.2
NetC33_2: C33.2 R16.1 U3.5 Y2.1 | length 823.9
  Top Layer w10: U3.5 2363.74,2730.19 2356.33,2722.78 2356.33,2680 v1(2435,2601.33) ; Y2.1 2460.75,2330.75 2443,2348.5 R16.1 2443,2502 2442.5,2502.5 C33.2
  Bottom Layer w10: Y2.1 v1(2435,2601.33)
NetC34_2: C34.2 R16.2 U3.6 Y2.2 | length 1050.1
  Top Layer w10: U3.6 2383.42,2893 v1(2392.42,2902) ; R16.2 2549,2459.94 2556.56,2467.5 C34.2 2627.13,2450.31 Y2.2
  Bottom Layer w10: v1(2392.42,2902) 2627.13,2667.3 Y2.2
NetC35_1: C35.1 C36.1 R17.2 U3.13 | length 1876.8
  Top Layer w10: R17.2 1812.5,2249 1818,2254.5 v1@1818,2283 ; C36.1 C35.1 v1@1818,2283 ; v1(1824,2277) v1@1818,2283 ; v1(2148,2417) 2160,2405 2338,2405 2397,2346 2397,2280 2410,2267 2653,2267 2666,2280 2666,2599 2521.22,2743.78 U3.13
  Bottom Layer w10: v1(1824,2277) 1948.14,2401.14 2132.14,2401.14 v1(2148,2417)
NetC37_1: C37.1 U3.47 | length 81.8
  Top Layer w10: U3.47 2304.68,3324 2307,3326.32 C37.1
NetC38_2: C38.2 U3.18 | length 155.6
  Top Layer w10: U3.18 2775.82,2921.61 C38.2
NetC41_2: C41.2 U3.31 | length 149
  Top Layer w10: U3.31 2774.92,3177.52 C41.2
NetC42_2: C42.2 U4.7 Y3.1 | length 761
  Top Layer w10: U4.7 2555,4210 v1(2571,4226) ; Y3.1 3146,4200 3148.5,4202.5 C42.2
  Bottom Layer w10: v1(2571,4226) 3029,4226 Y3.1
NetC43_2: C43.2 U4.8 Y3.2 | length 962.5
  Top Layer w10: v1(2418,4260) U4.8 ; Y3.2 3224.69,4392.13 C43.2
  Bottom Layer w10: v1(2418,4260) 2550.13,4392.13 Y3.2
NetC44_1: C44.1 U4.4 | length 323.9
  Top Layer w10: U4.4 2793,4060 C44.1
NetD1_2: D1.2 U3.1 | length 1499.2
  Top Layer w10: U3.1 2285,2780 2274,2769 2116,2769 2067,2720 2067,2399.55 2079.55,2387 2320,2387 2370,2337 D1.2
NetF1_1: F1.1 USB_232.5 | length 1726.8
  Top Layer w19.68: USB_232.5 2457.01,4582 2443,4582 2390,4635 2390,4680 2412,4702 3139,4702 3151,4690 3220,4690 3248,4662 3248,4520 3207,4479 2886,4479 2818,4411 F1.1
NetK1_3: K1.3 K1.4 USB_232.1 | length 895.2
  Top Layer w20: USB_232.1 2582.99,4600 2614.12,4600 2654.12,4640 K1.3
  Bottom Layer w20: K1.3 K1.4
NetLED0_1: 
NetLED1_1: 
NetPHONE2_1: PHONE2.1 R13.2 U1.39 | length 2526.7
  Top Layer w10: U1.39 4086,3165.94 4091.06,3171 4274,3171 4279.94,3165.06 R13.2 4421.56,3131 4499,3131 4499,2840 4469,2810 4340,2810 4317,2787 4317,1929.22 4603.11,1643.11 4549,1589 4549,1461 PHONE2.1@4603.11,1406.89
NetPHONE2_2: PHONE2.2 R12.2 U1.46 | length 2464.3
  Top Layer w10: U1.46 4136.26,3303.74 ; v1(4169,3271) 4136.26,3303.74 ; R12.2 4316.18,3303.74 4136.26,3303.74 ; PHONE2.2@4740.91,1406.89 PHONE2.2@4740.91,1643.11
  Bottom Layer w10: v1(4169,3271) 4740.91,2699.09 PHONE2.2@4740.91,1643.11
NetPHONE2_3: PHONE2.3 R14.2 U1.42 | length 2572.2
  Top Layer w10: U1.42 4362.44,3225 R14.2 4405.56,3212 v1(4606,3212) ; v1(4834,2984) 4866.89,2951.11 4866.89,1643.11 4789,1565.22 4789,1484.78 PHONE2.3@4866.89,1406.89
  Bottom Layer w10: v1(4606,3212) v1(4834,2984)
NetPWR_1: PWR.1 R20.2 | length 353
  Top Layer w10: PWR.1 1787.4,1749.97 R20.2
NetQ1_2: Q1.2 R22.2 | length 108
  Top Layer w10: Q1.2 1783,4047.6 1793.1,4037.5 R22.2
NetQ1_3: Q1.3 R23.1 | length 2014.2
  Top Layer w10: Q1.3 1643.74,3794.26 1952,3486 1952,2306 R23.1
NetQ2_1: Q2.1 R22.1 U4.14 | length 473.5
  Top Layer w10: R22.1 1891,3983 1891.4,3982.6 Q2.1 1975.24,3982.6 1986.56,3971.28 2137.28,3971.28 2176,4010 U4.14
NetQ2_2: Q2.2 U4.13 | length 414.8
  Top Layer w10: Q2.2 1943.74,4043 1997.46,3989.28 2068,3989.28 2138.72,4060 U4.13
NetQ2_3: Q2.3 R24.2 | length 250.4
  Top Layer w10: Q2.3 2036.26,4144 2037.5,4145.24 R24.2
NetR1_1: R1.1 U1.26 | length 623.2
  Top Layer w10: R1.1 3775,2762 3779.33,2766.33 U1.26
NetR4_1: R4.1 U1.33 U1.34 | length 158.5
  Top Layer w10: R4.1 3918,3003 3917.13,3003.87 U1.33 U1.34
PA8: U1.23 U3.41 | length 1420
  Top Layer w10: U3.41 2422.79,3321.79 v1(2430,3329) ; v1(3506.74,3146.26) U1.23
  Bottom Layer w10: v1(2430,3329) 3301.94,3329 3342,3288.94 3364.06,3288.94 v1(3506.74,3146.26)
PD2: U3.54
RESET: C26.2 D3.1 R11.2 RESET.1 TFTLCD.5 U3.7 | length 7951.3
  Top Layer w10: R11.2 1397.5,3467.5 1410,3455 1410,2785 1454,2741 1454,2519.5 1452.5,2518 C26.2 1555,2222.44 D3.1 ; v1(2383.11,2696) 2403.11,2716 U3.7 ; TFTLCD.5 v1(3660,3023)
  Bottom Layer w10: RESET.1@1410,2785 RESET.1@1665.91,2785 ; v1(2383.11,2696) 2217.47,2861.64 2217.47,3013.53 2184,3047 1927.91,3047 RESET.1@1665.91,2785 ; v1(3660,3023) 3660,3167.67 3520,3307.67 3355.33,3307.67 3307,3356 2426,3356 2306,3476 1835,3476 1665.91,3306.91 RESET.1@1665.91,2785
RXD: U3.43 U4.3 | length 1344.1
  Top Layer w10: v1(2294,3388) 2241,3388 2172,3457 2172,3937 2220,3985 2415.5,3985 2440.5,4010 U4.3 ; v1(2296.5,3184.5) 2319,3207 2383.42,3207 U3.43
  Bottom Layer w10: v1(2294,3388) 2294,3187 v1(2296.5,3184.5)
"SD CS": SD_CARD.1 U3.17 | length 1601.5
  Top Layer w10: U3.17 2730,2901.93 2785.93,2846 v1(2806,2846)
  Bottom Layer w10: v1(2806,2846) 3592,2060 SD_CARD.1
"SPI CLK": SD_CARD.5 U1.28 U3.21 U5.6 | length 2486.8
  Top Layer w10: U3.21 v1(2713,2980.67) ; v1(3802,2622) 3802,2662.63 3818.22,2678.85 ; U1.28 3818.7,2679.34 3818.22,2678.85 ; v1(3851,2507) 3851,2586.7 3818.22,2619.48 3818.22,2678.85 ; U5.6 4105,2281 v1(4130,2306)
  Bottom Layer w10: v1(2713,2980.67) 2713,3031 2730,3048 2802.76,3048 3228.76,2622 v1(3802,2622) ; v1(3851,2507) 3862,2507 3889,2480 3889,2453.03 SD_CARD.5 3982.97,2453.03 v1(4130,2306)
"SPI MISO": SD_CARD.7 U1.30 U3.22 U5.2 | length 3709.2
  Top Layer w10: v1(2504.22,3088) 2504.22,3070 2573.87,3000.35 U3.22 ; v1(3688,2749) 3688,2395 3760,2323 3952,2323 3987,2358 4112.94,2358 4154.94,2400 U5.2 ; v1(3845,2646.93) 3845,2878 3858.07,2891.07 U1.30
  Bottom Layer w10: v1(2504.22,3088) 2415,3177.22 2415,3220 2439,3244 3231.49,3244 3726.49,2749 ; v1(3688,2749) 3726.49,2749 ; SD_CARD.7 v1(3845,2646.93) 3829,2646.93 ; 3726.49,2749 3726.93,2749 3829,2646.93 ; 3726.49,2749 3828.56,2646.93 3829,2646.93
"SPI MOSI": SD_CARD.2 U1.29 U3.23 U5.5 | length 3185.8
  Top Layer w10: U3.23 v1(2740,3020.04) ; U1.29 3838.39,3121.39 v1(3852,3135) ; v1(4043,2158) 4055,2170 U5.5
  Bottom Layer w10: v1(2740,3020.04) 3602.04,2158 3825,2158 ; v1(3852,3135) 4095,2892 4095,2732 3973,2610 3880,2610 3783,2513 3783,2200 3825,2158 ; v1(4043,2158) SD_CARD.2 3825,2158
"T CLK": TFTLCD.34 U3.8 | length 1630.3
  Top Layer w10: TFTLCD.34 2187,1448 2187,2097 v1(2327,2237) ; v1(2422.79,2654.39) U3.8
  Bottom Layer w10: v1(2327,2237) 2327,2631 2350.39,2654.39 v1(2422.79,2654.39)
"T CS": TFTLCD.33
"T MISO": TFTLCD.29 U3.10 | length 1369.9
  Top Layer w10: v1(2462.16,2646) U3.10
  Bottom Layer w10: TFTLCD.29 2460,2243 2473,2256 2473,2635.16 v1(2462.16,2646)
"T MOSI": TFTLCD.30 U3.11 | length 2531.3
  Top Layer w10: TFTLCD.30 2504.33,1330.67 2504.33,1170 2514.33,1160 2746,1160 2803,1217 2803,2625.31 v1(2763,2665.31) ; U3.11 v1(2481.85,2935.22)
  Bottom Layer w10: v1(2481.85,2935.22) 2533.09,2935.22 2763,2705.31 v1(2763,2665.31)
"T PEN": TFTLCD.31 U3.9 | length 3188.8
  Top Layer w10: v1(1925,1910) v1(1925,3434) ; v1(2339,3179) 2339,3133.78 2451.78,3021 2451.78,2947.59 2442.48,2938.29 U3.9
  Bottom Layer w10: v1(1925,1910) TFTLCD.31 ; v1(1925,3434) 1938,3447 2283.78,3447 2339,3391.78 v1(2339,3179)
TXD: U3.42 U4.2 | length 972
  Top Layer w10: U3.42 2403.11,3349.11 2411,3357 2570,3357 2582,3369 2582,3633 2441,3774 2441,3950 2451,3960 U4.2
VCC: C1.2 C2.2 C3.2 C27.2 C37.2 C38.1 C39.2 C41.1 C45.2 C48.2 C49.1 C50.1 D1.1 D3.2 D4.2 kEY0.1 KEY1.1 Q1.1 R1.2 R8.1 R11.1 R17.1 R20.1 R24.1 R25.1 SD_CARD.4 TFTLCD.24 TFTLCD.25 U1.6 U1.14 U1.19 U1.32 U2.3 U3.19 U3.32 U3.48 U3.64 U5.3 U5.7 U5.8 U7.2 U7.4 | length 23235.7
  Top Layer w11.5: KEY1.1@1960.91,4562 1916,4517.09 1916,4337 R24.1 ; C27.2 2131,2887.5 2145.43,2901.93 U3.64 ; C37.2 2285,3312.56 U3.48 ; U3.19 2779.3,2941.3 C38.1 ; U3.32 2770.2,3197.2 C41.1 ; U1.19 3752,3225 3752,3315.56 ; C1.2 3877.76,3519.81 3877.76,3440 ; U1.6 3877.76,3440 ; U1.32 3897.44,3170.12 3752,3315.56 ; 3657,3324 3743.56,3324 3744.13,3323.42 ; 3657,3324 3621,3360 3621,3401 3680,3460 3857.76,3460 3877.76,3440 ; 3657,3324 3657.58,3323.42 U1.14 3744.13,3323.42 ; 3744.13,3323.42 3752,3323.42 3752,3315.56 ; 3744.13,3323.42 3752,3315.56
  Top Layer w18: C27.2 2045,2887.5 2045,2352 2157,2240 2157,1316.38 ; v1(2156,4443) R24.1 ; D1.1 2230,1680 2280,1630 2360,1630 ; C37.2 1700,3897.56 1700,4080 1710,4090 1803,4090 R24.1 ; v1(2564,4443) R25.1 ; TFTLCD.25 2505,1630 2360,1630 ; C39.2 2760,1222.44 TFTLCD.24 2713,1422 2713,2660.78 2880.96,2828.74 2880.96,2871.04 C38.1 ; C41.1 v1(2836,3217) ; C50.1 3327.75,3610.75 3327.75,3650 3317.5,3660.25 C45.2 3317.5,3724 3327.5,3734 C48.2 3372.37,3730.06 C2.2 ; v1(3337,3068) 3719,3062 3719,2453.44 R1.2 3985.5,2397.5 ; v1(3680,4443) 3680,4390 3720,4350 C49.1 C49.1@3805,4350 ; C1.2 3857.5,3585 3852.5,3590 C3.2 C2.2 ; v1(3961,2373) 3985.5,2397.5 ; U5.7 U5.8 4205,2347 4234,2376 4234,2560 4224,2570 4114.94,2570 ; U7.2 U7.4 3960.06,4390.06 3920,4350 C49.1@3805,4350 ; R8.1 4395,2958.06 4405.06,2948 U2.3 4325,2860.03 4295,2830.03 4295,2680 4255,2640 4184.94,2640 4114.94,2570 ; R24.1 1800,4270 1736.26,4206.26 Q1.1 1594.6,4122.4 1592,4125 R11.1 1521,4056 1521,2521 1695,2347 D3.2 1782,2110 R17.1 R20.1 1867,1528 2078.62,1316.38 2157,1316.38 ; 2157,1316.38 2368.38,1316.38 2407,1355 2407,1583 2360,1630 ; C49.1@3805,4350 D4.2 3805,3777.56 C2.2 ; 3985.5,2397.5 3989.53,2401.53 4066.47,2401.53 4104.94,2440 U5.3 4104.94,2560 4114.94,2570
  Bottom Layer w11.5: kEY0.1@1328,4572 1583.91,4572 1639,4572 1649,4562 1705,4562 KEY1.1@1960.91,4562
  Bottom Layer w18: v1(2156,4443) v1(2564,4443) v1(3680,4443) ; TFTLCD.25 TFTLCD.24 2807,1422 3388,1422 3413,1397 3413,1320 3473,1260 3893,1260 4083,1450 4083,2311.61 3961,2311.61 3942.61,2354.61 ; v1(2836,3217) 3188,3217 v1(3337,3068) ; SD_CARD.4 3942.61,2354.61 ; v1(3961,2373) 3942.61,2354.61
VCC5: C40.1 C46.2 C47.1 C51.1 C52.1 D5.2 K1.2 K1.5 TFTLCD.28 U4.16 U7.3 | length 6130
  Top Layer w18: v1(2199,3910) U4.16@2292,3910 ; v1(2264,3419) 2275,3430 D5.2 2275,3590.06 2320,3635.06 C46.2 2372.5,3682 2373,3682.5 C47.1 2292,3811 U4.16@2292,3910 ; U4.16 U4.16@2292,3910 ; C40.1 2560,1222 TFTLCD.28 ; K1.5 3485,4740 3501,4756 3660,4756 3711,4705 C51.1 3849,4705 3934.03,4790.03 U7.3 4296.97,4790.03 C52.1
  Bottom Layer w18: v1(2199,3910) 2125,3984 2125,4463 2402,4740 K1.2 K1.5 ; v1(2264,3419) 2246.9,3401.9 2246.9,2874.9 2395.52,2726.29 2430.06,2726.29 2507.91,2648.44 2507.91,1456.14 2524.53,1439.53 2524.53,1410.47 TFTLCD.28
"VS DREQ": U1.8 U3.45 | length 1724.5
  Top Layer w10: U3.45 2344.05,3382.05 2400,3438 2503,3438 v1(2555,3386) ; v1(3649,3386) 3704,3441 3838.39,3441 U1.8
  Bottom Layer w10: v1(2555,3386) v1(3649,3386)
"VS XDCS": U1.13
"VS XREST": U1.3 U3.44 | length 1771.9
  Top Layer w10: U3.44 2363.74,3340.85 2417.89,3395 v1(2438,3395) ; U1.3 3936.81,3350.19 v1(3944,3343)
  Bottom Layer w10: v1(2438,3395) 2455.78,3412.78 3874.22,3412.78 v1(3944,3343)
pads on no net: K1.1 K1.6 PHONE1.0 PHONE2.0 SD_CARD.8 SD_CARD.9 SD_CARD.10 SD_CARD.11 SD_CARD.12 TFTLCD.32 U1.9 U1.10 U1.11 U1.12 U1.15 U1.25 U1.27 U1.36 U3.2 U3.14 U3.15 U3.20 U3.24 U3.25 U3.46 U3.49 U3.50 U4.9 U4.10 U4.11 U4.12 U4.15 USB_232.4 USB_232.6 USB_232.7 USB_232.8 USB_232.9 USB_232.MH1 USB_232.MH2 X1. Y2. Y3.
copper on no net: | length 65.1
  Bottom Layer w10: 1460,4790 cw(c1450,4795) 1461.18,4795

## Polygon pours and split planes (outlines as drawn)
GND on Top Layer "Bottom Layer-No Net" (solid, remove dead copper, pour order 3): 1125,5056 1192,4989 5281,4989 5281,1132 4934,785 4800,919 1174,919
GND on Bottom Layer "Bottom Layer-No Net" (solid, remove dead copper, pour order 5): 1077,5214 5244,5214 5408,5050 5171,4813 5171,858 1174,858 1083,949

## Keep-outs
Keep-Out Layer:
  lines w10: 1274.7,1230 ccw(c1440,1230) 1450,1065 4911,1065 ; 1275,1217 1275,1235 1275,4802.66 cw(c1456.74,4792.84) 1397.71,4965 ; 1389.92,4963.92 4908.08,4963.92 cw(c4867.4,4760.53) 5070,4805 5070,1240.34 cw(c4886.41,1250) 4881.16,1066.23

## Silkscreen, mask and mechanical layers (free items; w line width, h text height)
Top Overlay:
  text "-" at 3495,4658 h60 r270
  text "+" at 3840,4612 h60
  text "-" at 3431,4370 h60 r270
  text "+" at 3875,4314 h60

## Text inside footprints (layer, text, board x,y; h text height)
TFTLCD: Top Overlay "2" at 3980,1395 h50 r180; Top Overlay "1" at 3980,1495 h50 r180; Top Overlay "33" at 2200,1495 h50 r180; Top Overlay "34" at 2200,1395 h50 r180
U2: Top Overlay "1" at 4232.06,2654.03 h50 r90; Top Overlay "3" at 4232.06,2834.03 h50 r90
U7: Top Overlay "1" at 4027.06,4584.03 h50 r90; Top Overlay "3" at 4027.06,4764.03 h50 r90